# Altium PCB Neural_Interface.PcbDoc
Units mil, origin at the board's own origin, x right, y up, seen from the top; angles counter-clockwise.
Board outline 730 x 550 mil, 4 copper layers (Top Copper Layer, Internal Copper Layer 1, Internal Copper Layer 2, Bottom Copper Layer), stack 62.205 mil thick; 14 components, 31 nets, 97 pads, 12 vias.
Unrouted connection lines stored in the file: 2.
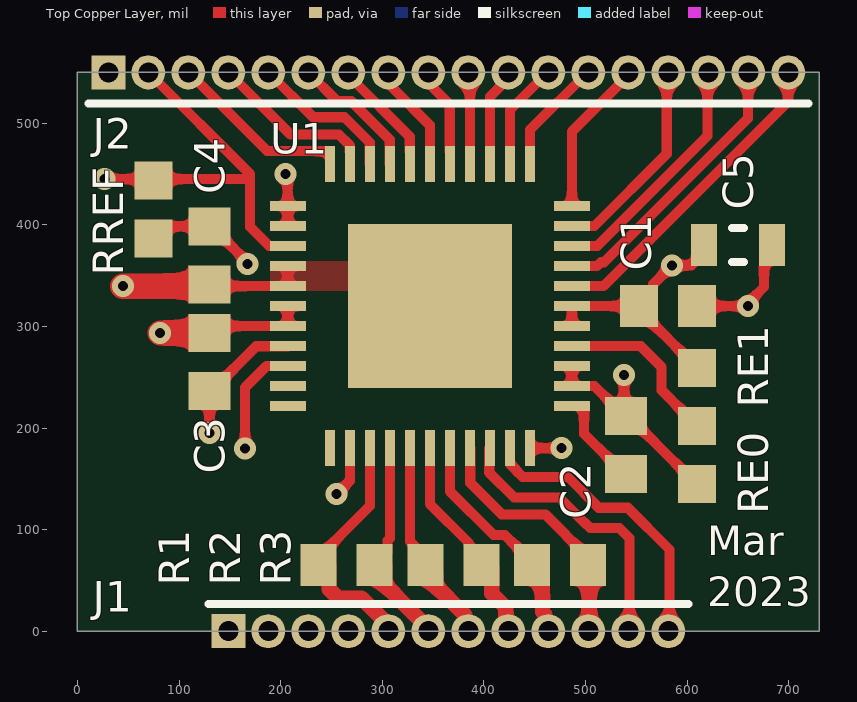
[diagram p0: Top Copper Layer view]
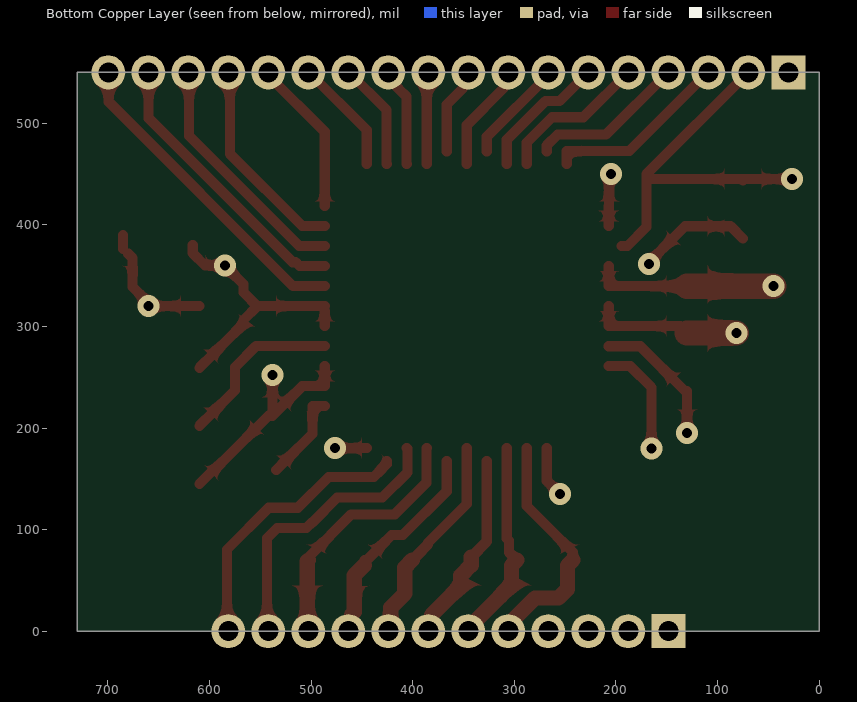
[diagram p1: Bottom Copper Layer view, seen from below]
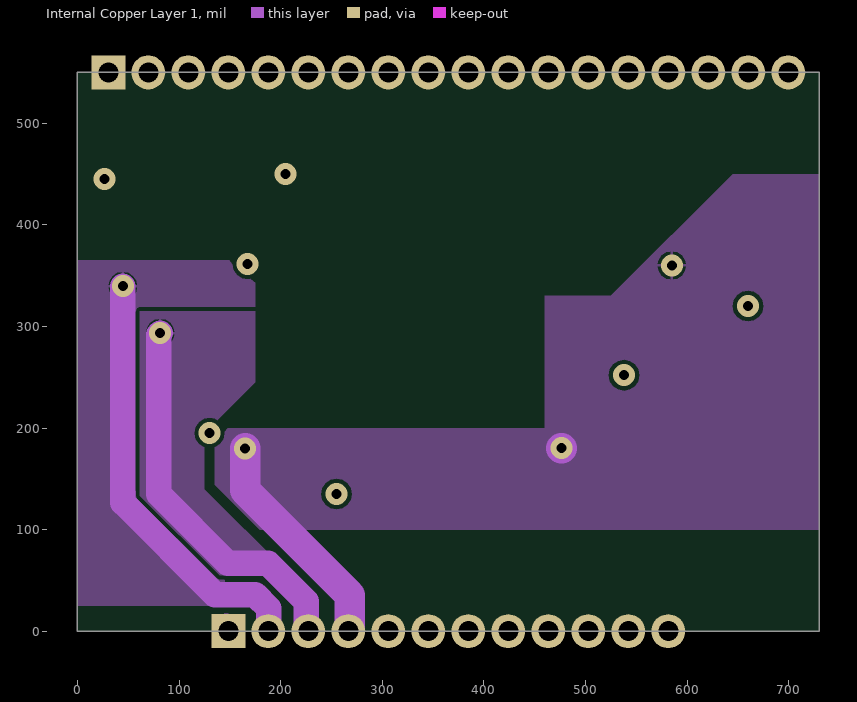
[diagram p2: Internal Copper Layer 1]
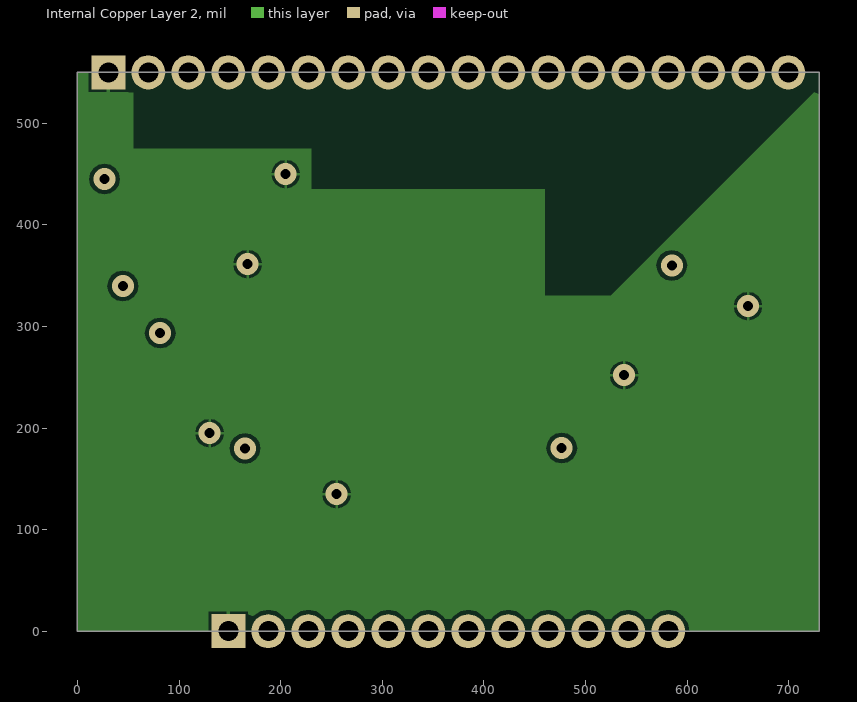
[diagram p3: Internal Copper Layer 2]
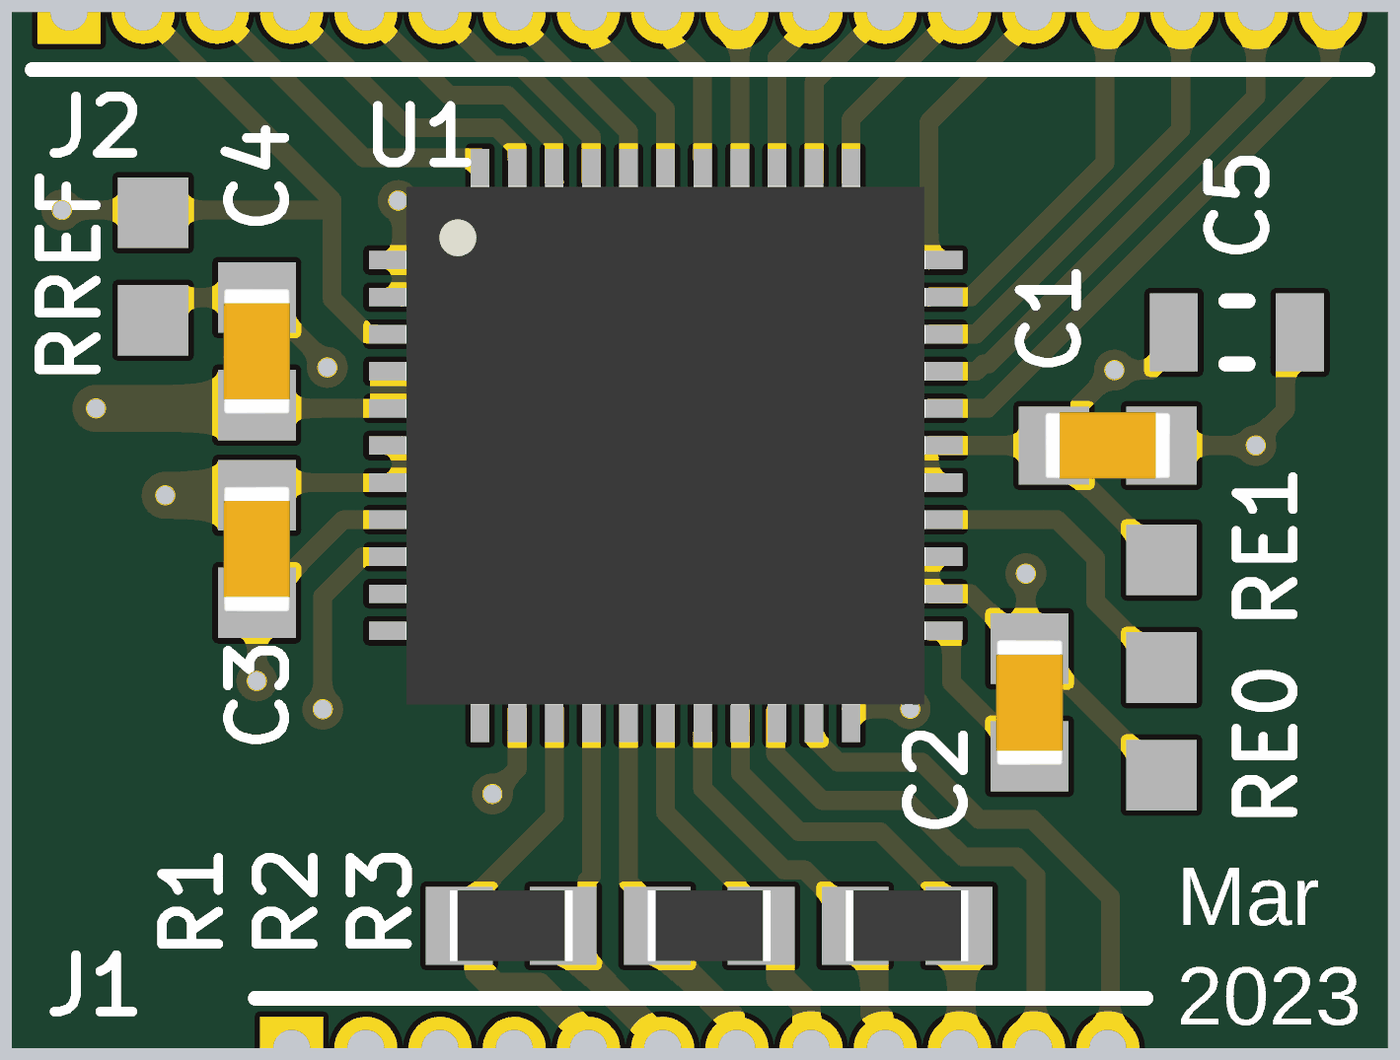
[diagram p4: 3D render of the assembled board from above, using the file's embedded part models]

## Layer stack, top to bottom
Top Solder: solder mask 0.3937, Solder Resist, Dk 3.5
Top Copper Layer: signal copper 1.378
Dielectric 1: prepreg 8.6614, FR-4, Dk 4.2
Internal Copper Layer 1: signal copper 1.378
Dielectric 2: core 39.3701, FR-4, Dk 4.2
Internal Copper Layer 2: signal copper 1.378
Dielectric 3: prepreg 8.6614, FR-4, Dk 4.2
Bottom Copper Layer: signal copper 1.378
Bottom Solder: solder mask 0.3937, Solder Resist, Dk 3.5

## Board outline
0,0 730,0 730,550 0,550

## Design rules (kind name [scope] priority, off if disabled: settings)
BoardOutlineClearance [All] p1: gap=0 ignorepadtopadclearanceinfootprint=FALSE
Clearance [All] p1: gap=4 ignorepadtopadclearanceinfootprint=FALSE
ComponentClearance [All] p1: gap=3.94 collisioncheckmode=3 verticalgap=3.94 showdistances=FALSE
DiffPairsRouting [All] p1: maxlimit=10 minlimit=10 mostfreqgap=10 toplayer_minwidth=15 toplayer_maxwidth=15 toplayer_prefwidth=15 midlayer1_minwidth=15 midlayer1_maxwidth=15 midlayer1_prefwidth=15 midlayer2_minwidth=15 midlayer2_maxwidth=15 midlayer2_prefwidth=15 bottomlayer_minwidth=15 bottomlayer_maxwidth=15 bottomlayer_prefwidth=15 maxuncoupledlength=500
HoleSize [All] p1: absolutevalues=TRUE maxlimit=100 minlimit=3.94 maxpercent=80.000 minpercent=20.000
HoleToHoleClearance [All] p1: gap=10.83 allowstackedmicrovias=TRUE
MinimumAnnularRing [All] p1: minimumring=3.94
MinimumSolderMaskSliver [All] p1: minsoldermaskwidth=2.95
PlaneClearance [All] p1: clearance=2.95
PlaneConnect [All] p1: planeconnectstyle=Relief reliefexpansion=5.91 reliefentries=4 reliefconductorwidth=2.95 reliefairgap=2.95
PolygonConnect [All] p1: connectstyle=Relief reliefconductorwidth=2.95 reliefentries=4 polygonreliefangle="90 Angle" airgapwidth=2.95
RoutingVias [All] p1: holewidth=9.84 width=23.62 viastyle="Through Hole" minholewidth=3.94 minwidth=7.87 maxholewidth=28 maxwidth=50
SilkToSilkClearance [All] p1: silktosilkclearance=5.91
SilkToSolderMaskClearance [IsPad] p1: minsilkscreentomaskgap=5.91 clearancetoexposedcopper=TRUE
SolderMaskExpansion [All] p1: expansion=2.95 istentingtop=FALSE
Width [All] p1: maxlimit=1968.5 minlimit=2.95 preferedwidth=5.91
21 further rules are at their usual default settings.

## Classes and differential pairs
net class ELEC[0..15]: ELEC0 ELEC1 ELEC2 ELEC3 ELEC4 ELEC5 ELEC6 ELEC7 ELEC8 ELEC9 ELEC10 ELEC11 ELEC12 ELEC13 ELEC14 ELEC15
component class U_Intan_RHS2116: C1 C2 C3 C4 C5 U1
component class Neural_Interface: J1 J2 R1 R2 R3 RE0 RE1 RREF
differential pair SCLK1h: +SCLK1h_P -SCLK1h_N
differential pair nCS1h: +nCS1h_P -nCS1h_N
differential pair MOSI1h: +MOSI1h_P -MOSI1h_N
differential pair MISO1h: +MISO1h_P -MISO1h_N

## Components (designator, comment, footprint, x,y, rotation, side; value= is the part's Value field where it differs from the comment)
C1 "GRM188R71H104KA93D" CAPC1608X90X35ML10T15 581.46,320 r180 top
C2 "GRM188R71H103KA01D" CAPC1608X90X35ML10T15 540,183.54 r270 top
C3 "GRM188R71H104KA93D" CAPC1608X90X35ML10T15 130,265 r90 top
C4 "GRM188R71H104KA93D" CAPC1608X90X35ML10T15 130,370 r270 top
C5 "C1608X5R1A106K080AC" CAPC1608X90X20ML10 650,380 r180 top
J1 "1mm_12pin" 1mm_12pin 365,0 r90 top locked
J2 "1mm_18pin" 1mm_18pin 365,550 r90 top locked
R1 "CRCW0603100RFKEA" RESC1609X50X30ML8T20 265,65 r0 top
R2 "CRCW0603100RFKEA" RESC1609X50X30ML8T20 475,65 r0 top
R3 "CRCW0603100RFKEA" RESC1609X50X30ML8T20 370,65 r0 top
RE0 "CRCW06030000Z0EAHP" RESC1609X55X30NL10T20 610,173.54 r90 top
RE1 "CRCW06030000Z0EAHP" RESC1609X55X30NL10T20 610,230.67 r90 top
RREF "CRCW06030000Z0EAHP" RESC1609X55X30NL10T20 75,415 r90 top
U1 "Intan Technologies RHS2116 chip" QFN44_7_X_7 346.89,320 r0 top

## Footprints (in the part's own frame and the unit in brackets; to place one, negate y for a bottom-side part, rotate by r counter-clockwise, add the part's x,y. Pads: shape width x height; smd on the part's side, far side on the other; paste and mask are expansions set on the pad)
1mm_12pin [mm]
  rect 0.85x0.85 hole 0.5: 1(0,5.5)
  round 0.85 hole 0.5: 2(0,4.5) 3(0,3.5) 4(0,2.5) 5(0,1.5) 6(0,0.5) 7(0,-0.5) 8(0,-1.5) 9(0,-2.5) 10(0,-3.5) 11(0,-4.5) 12(0,-5.5)
  silkscreen extent 0.67,-6.01 0.67,5.99
1mm_18pin [mm]
  rect 0.85x0.85 hole 0.5: 1(0,8.5)
  round 0.85 hole 0.5: 2(0,7.5) 3(0,6.5) 4(0,5.5) 5(0,4.5) 6(0,3.5) 7(0,2.5) 8(0,1.5) 9(0,0.5) 10(0,-0.5) 11(0,-1.5) 12(0,-2.5) 13(0,-3.5) 14(0,-4.5) 15(0,-5.5) 16(0,-6.5) 17(0,-7.5) 18(0,-8.5)
  silkscreen extent -0.77,-9.01 -0.77,8.99
CAPC1608X90X20ML10 [mm] "Chip Capacitor, 2-Leads, Body 1.70x0.90mm, IPC Low Density"
  rect 0.65x1.05 smd: 1(-0.85,0) 2(0.85,0)
  silkscreen extent -0.15,-0.43 0.15,0.43, body extent -0.85,-0.45 0.85,0.45, height 0.9
CAPC1608X90X35ML10T15 [mm] "Chip Capacitor, 2-Leads, Body 1.7x0.9mm, IPC Low Density"
  rect 0.95x1.05 smd: 1(-0.725,0) 2(0.725,0)
  body extent -0.85,-0.45 0.85,0.45, height 0.9
QFN44_7_X_7 [mm]
  rect 0.9x0.25 smd: 1(-3.55,2.5) 2(-3.55,2) 3(-3.55,1.5) 4(-3.55,1) 5(-3.55,0.5) 6(-3.55,0) 7(-3.55,-0.5) 8(-3.55,-1) 9(-3.55,-1.5) 10(-3.55,-2) 11(-3.55,-2.5) 23(3.55,-2.5) 24(3.55,-2) 25(3.55,-1.5) 26(3.55,-1) 27(3.55,-0.5) 28(3.55,0) 29(3.55,0.5) 30(3.55,1) 31(3.55,1.5) 32(3.55,2) 33(3.55,2.5)
  rect 0.25x0.9 smd: 12(-2.5,-3.55) 13(-2,-3.55) 14(-1.5,-3.55) 15(-1,-3.55) 16(-0.5,-3.55) 17(0,-3.55) 18(0.5,-3.55) 19(1,-3.55) 20(1.5,-3.55) 21(2,-3.55) 22(2.5,-3.55) 34(2.5,3.55) 35(2,3.55) 36(1.5,3.55) 37(1,3.55) 38(0.5,3.55) 39(0,3.55) 40(-0.5,3.55) 41(-1,3.55) 42(-1.5,3.55) 43(-2,3.55) 44(-2.5,3.55)
  rect 4.1x4.1 smd: CENTER(0,0)
  body extent -3.5,-3.5 3.5,3.5, height 0.77
RESC1609X50X30ML8T20 [mm] "Chip Resistor, 2-Leads, Body 1.65x0.95mm, IPC Low Density"
  rect 0.9x1.05 smd: 1(-0.7,0) 2(0.7,0)
  body extent -0.82,-0.48 0.82,0.48, height 0.5
RESC1609X55X30NL10T20 [mm] "Chip Resistor, 2-Leads, Body 1.60x0.85mm, IPC Medium Density"
  rect 0.95x0.95 smd: 1(-0.725,0) 2(0.725,0)
  body extent -0.85,-0.48 0.85,0.48, height 0.55

## Part data
C1 C3 C4: library part CMP-2100-03643-1, "Chip Capacitor, 0.1 uF, +/- 10%, 50 V, -55 to 125 degC, 0603 (1608 Metric), RoHS, Tape and Reel", Capacitance=100nF, Case Code (Imperial)=0603, Case Code (Metric)=1608, Dielectric=X7R, Dielectric Material=Ceramic, Insulation Resistance=10GR, Manufacturer=Murata, Max Operating Temperature=125degC, Min Operating Temperature=-55degC, Package Description="2-Pin Surface Mount Device, Body 1.6 x 0.8 mm", Package Quantity=1, Tolerance=10%, Voltage=50V, Case/Package=0603, Contact Plating=Tin, Datasheet URL=http://psearch.en.murata.com/capacitor/product/GRM188R71H104KA93%23.pdf, Datasheet Version=42675.0, Depth=0.8mm, Height=0.8mm, Lead Free=LeadFree, Length=1.6mm, Manufacturer URL=http://www.murata.com/, Material=Ceramic, Mount=SurfaceMount, Number of Pins=2, Package Reference=0603, Packaging=TapeandReel, Radiation Hardening=No, REACH SVHC=NoSVHC, RoHSCompliant=true, Termination=SMD/SMT, Thickness=0.035inch, Voltage Rating=50V, Voltage Rating (DC)=50V, Width=0.8mm
C2: library part CMP-2100-03642-1, "Chip Capacitor, 10 nF, +/- 10%, 50 V, -55 to 125 degC, 0603 (1608 Metric), RoHS, Tape and Reel", Capacitance=10nF, Case Code (Imperial)=0603, Case Code (Metric)=1608, Dielectric=X7R, Dielectric Material=Ceramic, Insulation Resistance=10GR, Manufacturer=Murata, Max Operating Temperature=125degC, Min Operating Temperature=-55degC, Package Description="2-Pin Surface Mount Device, Body 1.6 x 0.8 mm", Package Quantity=1, Tolerance=10%, Voltage=50V, Case/Package=0603, Datasheet URL=http://search.murata.co.jp/Ceramy/image/img/A01X/G101/ENG/GRM188R71H103KA01-01.pdf, Datasheet Version=42401.0, Depth=0.8mm, Height=0.8mm, Lead Free=LeadFree, Length=1.6mm, Manufacturer URL=http://www.murata.com/, Material=Ceramic, Mount=SurfaceMount, Number of Pins=2, Package Reference=0603, Packaging=TapeandReel, REACH SVHC=Unknown, RoHSCompliant=True, Termination=SMD/SMT, Thickness=0.035inch, Voltage Rating=50V, Voltage Rating (DC)=50V, Width=0.031inch
C5: library part CMP-2000-04979-1, "Chip Capacitor, 10 uF, +/- 10%, 10 V, -55 to 85 degC, 0603 (1608 Metric), RoHS, Tape and Reel", Capacitance=10µF, Manufacturer=TDK, Operating Temperature=-55degC~85degC, Package / Case=0603(1608Metric), Package Description="2-Pin Surface Mount Device, Body 1.6 x 0.8 mm", Package Reference=603, PCN Part Number=MLCCPartNumberChange30/Nov/2012, Ratings=-, Standard Package=1, Temperature Coefficient=X5R, Tolerance=±10%, Voltage - Rated=10V, Applications=GeneralPurpose, Category=Capacitors, Datasheet URL=http://download.siliconexpert.com/pdfs/2015/4/21/15/54/45/779/tdk_/manual/37024850441143360mlcc_commercial_general_en.pdf, Datasheet Version=Mar-15, Design Resources=20WNon-IsolatedBuckLEDDriverUsingPLLNK460KG, Family=CeramicCapacitors, Features=-, Height - Seated (Max)=-, Kits=445-9003-KIT-ND-KITCAPCERHICAPMLCCSMD, Lead Spacing=-, Lead Style=-, Manufacturer URL=http://www.tdk.com/, Mounting Type=SurfaceMount,MLCC, Online Catalog=CSeries,GeneralPurpose, Other Names=445-7486-1, Packaging=CutTape(CT), Product Training Modules=CSeriesGeneralApplicationsSEAT,CCV,andTVCLDesignToolsGuidetoReplacinganElectrolyticCapacitorwithanMLCC, RoHS Information=RoHSCertificate-MLCC, Series=C, Size / Dimension="0.063\"Lx0.031\"W(1.60mmx0.80mm)", Thickness (Max)="0.035\"(0.90mm)"
R1 R2 R3: library part CMP-1666-00008-4, "Chip Resistor, 100 Ohm, +/- 1%, 100 mW,-55 to 155 degC, 0603 (1608 Metric), RoHS, Tape and Ree", Manufacturer="Vishay Semiconductor", ComponentLink1Description="Manufacturer URL", ComponentLink1URL=http://www.vishay.com/, ComponentLink2Description=Datasheet, ComponentLink2URL=http://www.vishay.com/docs/20035/dcrcwe3.pdf, DatasheetVersion=06/2012, Mounting Technology="Surface Mount", PackageDescription="2-Pin Surface Mount Device, Body 1.575 x 0.85 mm", PackageReference=0603
RE0 RE1 RREF: library part CMP-2000-03817-1, Manufacturer="Vishay Dale", Part Number=CRCW06030000Z0EAHP
U1: library part RHS2116_QFN, Manufacturer="Intan Technologies", Manufacturer Part Number=RHS2116, ComponentLink1Discription=Datasheet, ComponentLink1URL=http://intantech.com/files/Intan_RHS2116_datasheet.pdf, ComponentLink2Discription="Bare Die", ComponentLink2URL=http://intantech.com/files/RHS2116_die_diagram.pdf, Pricing 1="1-24=325;  25-99=278;  100-249=233;  250-499=188;  500-999=151  (USD)", Supplier 1=Intan, Supplier Link 1=http://intantech.com/products_RHS2000.html, Supplier Part Number 1=RHS2116

## Via types
v1: diameter 21.65, hole 9.84, Top Copper Layer to Bottom Copper Layer, tented both sides, 12 vias

## Nets (pads, with @x,y where several pads share a name; then routed paths per layer and width w, separated by ;. In a path a pad name is that pad's centre, name@x,y a point inside that pad or via, vN(x,y) a via of type N, cw(c..) or ccw(c..) an arc to the next point about the centre after c; other vN are vias at no path point)
ELEC0: J2.3 U1.44 | length 181.5
  Top Copper Layer w10: J2.3@111.12,548.42 186.82,472.72 248.14,472.72 248.46,472.39 U1.44
ELEC1: J2.4 U1.43 | length 154.9
  Top Copper Layer w10: J2.4@148.62,550 209.86,488.76 257.51,488.76 268.07,478.21 U1.43@268.07,472.48
ELEC2: J2.5 U1.42 | length 149.6
  Top Copper Layer w10: J2.5@187.99,550 232.09,505.91 262.87,505.91 287.75,481.02 287.75,459.84 U1.42
ELEC3: J2.6 U1.41 | length 131.6
  Top Copper Layer w10: J2.6@227.36,550 255.55,521.81 269.45,521.81 307.44,483.83 307.44,459.84 U1.41
ELEC4: J2.7 U1.40 | length 102.5
  Top Copper Layer w10: J2.7@266.73,550 266.73,547.03 327.12,486.64 U1.40@327.12,472.48
ELEC5: J2.8 U1.39 | length 107.1
  Top Copper Layer w10: J2.8@306.1,550 310.59,545.51 310.59,534.41 346.89,498.11 U1.39
ELEC6: J2.9 U1.38 | length 86.2
  Top Copper Layer w10: J2.9@345.47,550 349.96,545.51 349.96,535.04 366.5,518.5 U1.38@366.5,472.48
ELEC7: J2.10 U1.37 | length 90.2
  Top Copper Layer w10: U1.37 J2.10@386.26,550
ELEC8: J2.11 U1.36 | length 97.4
  Top Copper Layer w10: U1.36 406.03,459.84 406.03,526.03 414.22,534.22 414.22,534.56 423.31,543.65 J2.11@423.31,550
ELEC9: J2.12 U1.35 | length 105.6
  Top Copper Layer w10: U1.35 425.71,459.84 425.71,513.03 J2.12@462.68,550
ELEC10: J2.13 U1.34 | length 113.7
  Top Copper Layer w10: U1.34 445.32,493.27 J2.13@502.05,550
ELEC11: J2.14 U1.33 | length 154.3
  Top Copper Layer w10: U1.33 486.65,491.65 541.42,546.42 J2.14@541.42,550
ELEC12: J2.15 U1.32 | length 203.2
  Top Copper Layer w10: U1.32 486.73,398.82 508.83,398.82 580,469.99 580,549.21 J2.15@580.79,550
ELEC13: J2.16 U1.31 | length 240.8
  Top Copper Layer w10: U1.31 486.73,379.14 511.65,379.14 620.16,487.65 J2.16@620.16,550
ELEC14: J2.17 U1.30 | length 278.7
  Top Copper Layer w10: U1.30 486.73,359.45 511.51,359.45 515.29,363.23 518.23,363.23 659.98,504.98 J2.17@659.98,550
ELEC15: J2.18 U1.29 | length 316.7
  Top Copper Layer w10: U1.29 517.81,339.69 699.35,521.23 J2.18@699.35,550
GND: C1.1 C2.1 C3.1 C4.1 C5.1 J1.1 J2.1 RE0.1 RREF.1 U1.1 U1.2 U1.8 U1.13 U1.24 U1.25 | length 703.7
  Top Copper Layer w10: RREF.1 87.09,398.54 C4.1 131.97,398.54 164.5,366.01 164.5,364.32 v1(167.4,361.42) ; v1(130,195) C3.1 131.97,236.46 176.03,280.52 ; 176.03,280.55 207.05,280.55 U1.8 ; v1(205,450) 206.89,448.11 206.89,418.51 206.97,418.43 U1.1 U1.2 ; v1(255,135) 268.15,148.15 U1.13 ; U1.25 U1.24 508.86,241.26 524.33,225.79 538.03,212.09 v1(538.03,251.97) ; C2.1 541.97,212.09 595.35,158.7 596.3,158.7 RE0.1 ; C1.1 v1(660,320) 660,323.15 675.67,338.82 675.67,367.2 C5.1@680,371.54 ; C5.1@685,376.54 C5.1@685,390
  Internal Copper Layer 1 w25: J1.1@146.4,5.06 J1.1@150.63,0.83
LVDS_EN: RE0.2 RE1.1 U1.26 | length 169.3
  Top Copper Layer w10: U1.26 554.37,280.63 575,260 575,237.13 RE0.2@596.3,215.83 ; RE0.2@596.3,215.79 RE0.2
MISO1h_N: J1.11 U1.20 | length 280
  Top Copper Layer w10: U1.20 405.31,179.6 405.31,156.15 429.88,131.57 474.33,131.57 499.02,106.89 499.47,106.89 504.78,101.57 533.43,101.57 543.43,91.57 J1.11@543.43,0.83
MISO1h_P: J1.12 U1.21 | length 274.6
  Top Copper Layer w10: U1.21@425.63,167.52 425.63,164.57 438.3,151.9 482.75,151.9 513.07,121.57 541.71,121.57 582.8,80.49 J1.12@582.8,0.83
MOSI1h_N: J1.9 R2.1 U1.18 | length 209.7
  Top Copper Layer w10: U1.18@366.58,167.52 366.58,137.75 409.66,94.67 420.72,94.67 445.39,70 R2.1@447.44,70
  Top Copper Layer w15: R2.1 457.66,54.78 457.66,18.85 460.28,16.23 460.28,4.36 J1.9@463.81,0.83
MOSI1h_P: J1.10 R2.2 U1.19 | length 252.2
  Top Copper Layer w10: U1.19 386.58,180.24 386.58,146.04 417.62,115 460.51,115 502.56,72.95 R2.2@502.56,70
  Top Copper Layer w15: R2.2@502.56,70 503.76,68.8 J1.10@503.76,2.03
nCS1h_N: J1.5 R1.1 U1.14 | length 238.9
  Top Copper Layer w10: R1.1@242.44,70 242.44,77.95 287.83,123.34 U1.14
  Top Copper Layer w15: R1.1@242.44,70 247.66,64.78 247.66,41.44 256.44,32.66 279.53,32.66 302.8,9.39 302.8,6.14 J1.5@308.11,0.83
nCS1h_P: J1.6 R1.2 U1.15 | length 204.2
  Top Copper Layer w10: R1.2@297.56,70 305.28,77.72 305.28,89.28 307.52,91.53 U1.15
  Top Copper Layer w15: R1.2@297.56,70 302.78,64.78 302.78,45.53 J1.6@347.48,0.83
NetC2_2: C2.2 U1.23 | length 89.6
  Top Copper Layer w10: U1.23 498.55,221.57 498.63,221.49 498.63,194.4 524.33,168.7 C2.2@534.34,158.69
SCLK1h_N: J1.7 R3.1 U1.16 | length 189.4
  Top Copper Layer w10: U1.16@327.2,167.52 327.2,88.19 R3.1@342.44,72.95
  Top Copper Layer w15: R3.1 352.66,54.78 352.66,44.9 381.54,16.02 381.54,6.14 J1.7@386.85,0.83 ; R3.1@342.44,67.05 R3.1@342.44,72.95
SCLK1h_P: J1.8 R3.2 U1.17 | length 212.3
  Top Copper Layer w10: U1.17 346.89,125.26 384.84,87.31 384.84,85.67 R3.2@400.51,70
  Top Copper Layer w15: R3.2@400.51,70 407.78,62.74 407.78,37.23 421.57,23.44 421.57,5.48 J1.8@426.22,0.83
VDD: C1.2 C5.2 J1.4 RE1.2 U1.9 U1.22 U1.27 U1.28 | length 626.8
  Top Copper Layer w10: v1(165,180) 165,240 185.94,260.94 U1.9 ; U1.22 v1(476.65,180.24) ; U1.27 486.65,315 ; U1.28 C1.2 ; RE1.2 596.3,272.91 566.61,302.6 566.61,306.3 C1.2 ; C5.2 616.54,372.13 604.41,360 v1(585,360) 566.61,341.61 566.61,333.7 C1.2
  Internal Copper Layer 1 w30: v1(165,180) 165,138.73 268.08,35.65 J1.4@268.08,1.49 ; v1@476.41,180 v1(476.65,180.24)
VREF: J2.2 RREF.2 U1.3 | length 368.4
  Top Copper Layer w10: v1(26.57,445) RREF.2@73.54,445 ; J2.2@69.88,550 169.99,449.89 169.99,397.82 188.67,379.14 U1.3@194.41,379.14 ; RREF.2 76.46,445 169.99,445
VSTIMN: C4.2 J1.2 U1.4 U1.5 U1.CENTER | length 604.5
  Top Copper Layer w10: C4.2@130,339.69 U1.5 207.05,339.77 207.05,359.29 U1.4
  Top Copper Layer w25: v1(44.69,339.69) C4.2@130,339.69
  Internal Copper Layer 1 w25: v1(44.69,339.69) 44.69,126.6 135.33,35.96 174.99,35.96 188.38,22.57 188.38,2.45 J1.2@190,0.83
VSTIMP: C3.2 J1.3 U1.6 U1.7 | length 526.6
  Top Copper Layer w10: C3.2 136.77,300.31 U1.7 U1.6
  Top Copper Layer w25: v1(81.46,293.54) C3.2
  Internal Copper Layer 1 w25: v1(81.46,293.54) 80,292.09 80,135 148.13,66.87 187.79,66.87 225.14,29.52 225.14,7.35 229.37,3.12 J1.3@229.37,0.83
pads on no net: U1.10 U1.11 U1.12

## Polygon pours and split planes (outlines as drawn)
VDD on Internal Copper Layer 1 "VDD_L02_P015" (solid, pour order 15): 179.37,100 730,100 730,450 645,450 525,330 460,330 460,200 135,200 135,144.37
VSTIMN on Internal Copper Layer 1 "VSTIMN_L02_P014" (solid, pour order 14): 0,25 0,365 175,365 175,315 50,315 50,145 145,50 145,25
VSTIMP on Internal Copper Layer 1 "VSTIMP_L02_P013" (solid, pour order 13): 205,60 125,140 125,195 175,245 175,315 60,315 60,135 140,55 199.66,55 206.46,48.19
GND on Internal Copper Layer 2 "GND_L03_P016" (solid, pour order 16): 730,0 730,550 0,550 0,0
VSTIMN on Top Copper Layer "Top Copper Layer-VSTIMN" (solid, pour order 12): 352,364 352,335 190,335 190,364

## Other copper
Internal Copper Layer 2:
  pour cut-out: 55,475 230,475 230,435 460,435 460,330 525,330 730,535 730,550 55,550

## Silkscreen, mask and mechanical layers (free items; w line width, h text height)
Top Overlay:
  text "Mar / 2023" at 620,15 h50